# EAGLE board atmega328_tqfp32 (EAGLE 5.11)
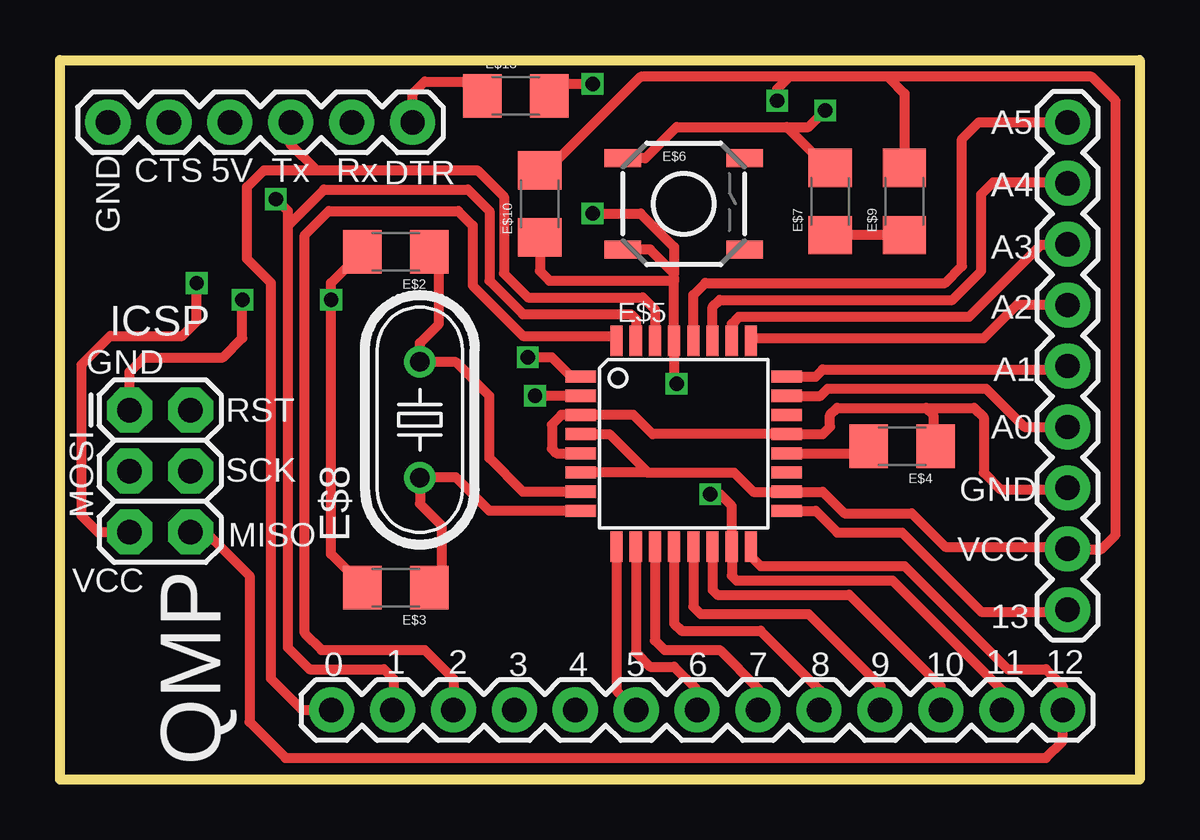
[diagram p0: board, top side]
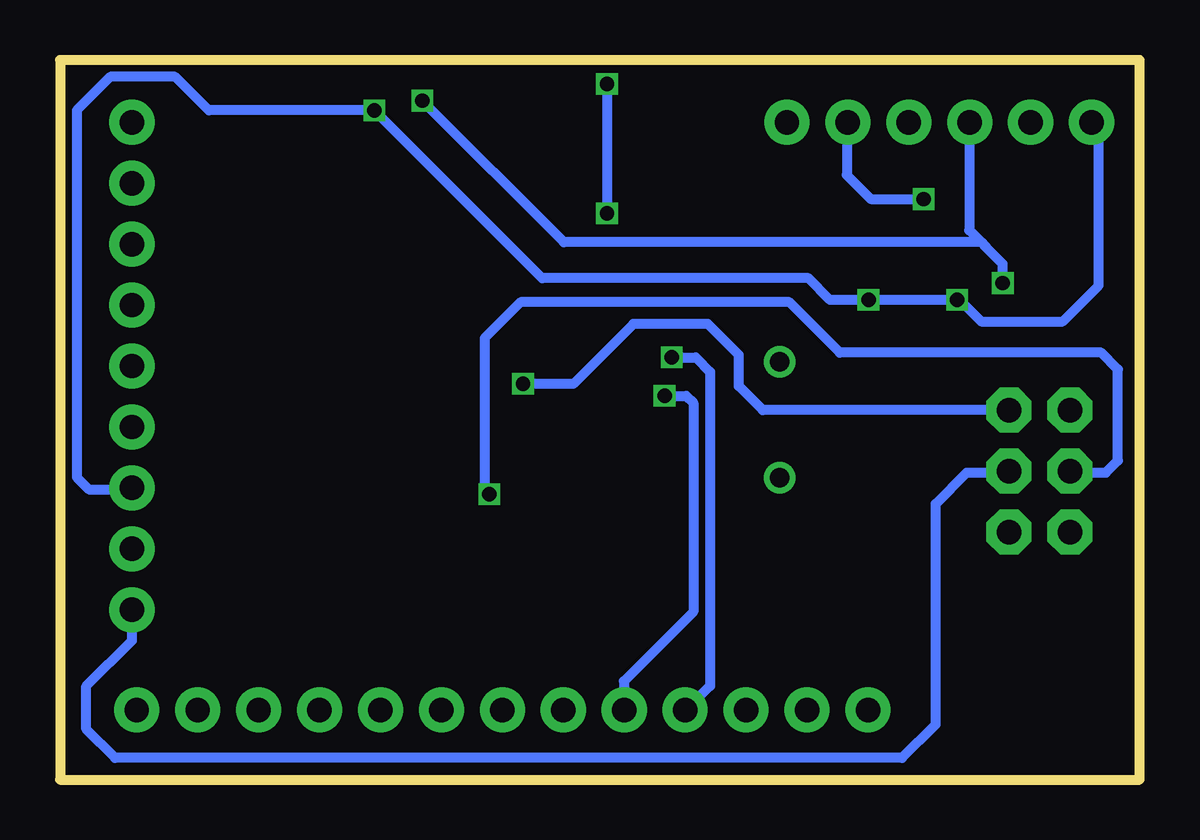
[diagram p1: board, bottom side, seen from below]

Size 45 x 30 mm. Coordinates in mm from the lower left corner, seen from the top.
Outline: 0,0 0,30 45,30 45,0 0,0
Copper layers (1*16): Top 0.035mm / dielectric 1.5mm / Bottom 0.035mm
Design rules "Fusion_eagle_rule_v1.1": minimum track width 6mil, minimum drill 12mil, track to track 6mil, track to pad 6mil, pad to pad 6mil, via to via 6mil, smd to smd 0mil, copper to edge 10mil, drill to drill 10mil, minimum pad ring 10mil, minimum via ring 6mil, stop-mask expansion 2mil, vias tented up to drill 100mil, thermal gap 10mil

## Footprints (pad centres in the part's own frame; a part is rotated, then mirrored left to right if it is on the bottom)
1206 = smd 1.6 x 1.8: 1 -1.4,0; 2 1.4,0
TQFP32-08 = smd 1.27 x 0.508: 1 -4.293,2.8; 2 -4.293,2; 3 -4.293,1.2; 4 -4.293,0.4; 5 -4.293,-0.4; 6 -4.293,-1.2; 7 -4.293,-2; 8 -4.293,-2.8; 17 4.293,-2.8; 18 4.293,-2; 19 4.293,-1.2; 20 4.293,-0.4; 21 4.293,0.4; 22 4.293,1.2; 23 4.293,2; 24 4.293,2.8 | smd 0.508 x 1.27: 9 -2.8,-4.293; 10 -2,-4.293; 11 -1.2,-4.293; 12 -0.4,-4.293; 13 0.4,-4.293; 14 1.2,-4.293; 15 2,-4.293; 16 2.8,-4.293; 25 2.8,4.293; 26 2,4.293; 27 1.2,4.293; 28 0.4,4.293; 29 -0.4,4.293; 30 -1.2,4.293; 31 -2,4.293; 32 -2.8,4.293
TACTILE_SWITCH_SMD = smd 1.524 x 0.762: 1 -2.54,1.905; 2 2.54,1.905; 3 -2.54,-1.905; 4 2.54,-1.905
HC49U-V = drill 0.813 round: 1 -2.413,0; 2 2.413,0
1X09 = drill 1.016 pad 1.88 round: 1 0,0; 2 2.54,0; 3 5.08,0; 4 7.62,0; 5 10.16,0; 6 12.7,0; 7 15.24,0; 8 17.78,0; 9 20.32,0
1X13 = drill 1.016 pad 1.88 round: 1 0,0; 2 2.54,0; 3 5.08,0; 4 7.62,0; 5 10.16,0; 6 12.7,0; 7 15.24,0; 8 17.78,0; 9 20.32,0; 10 22.86,0; 11 25.4,0; 12 27.94,0; 13 30.48,0
1X06 = drill 1.016 pad 1.88 round: 1 0,0; 2 2.54,0; 3 5.08,0; 4 7.62,0; 5 10.16,0; 6 12.7,0
2X3 = drill 1.016 pad 1.88 octagon: 1 0,0; 2 0,2.54; 3 2.54,0; 4 2.54,2.54; 5 5.08,0; 6 5.08,2.54

## Placement (x,y rotation side)
E$2  [1206]  14,22 180 top
E$3  [1206]  14,8 180 top
E$4  [1206]  35.1,13.9 180 top
E$5  [TQFP32-08]  26,14 0 top
E$6  [TACTILE_SWITCH_SMD]  26,24 0 top
E$7  [1206]  32.1,24.1 90 top
E$8  [HC49U-V]  15,15 90 top
E$9  [1206]  35.2,24.1 90 top
E$10  [1206]  20,24 90 top
E$11  [1X09]  42,27.4 270 top
E$12  [1X13]  41.8,2.9 180 top
E$13  [1206]  19,28.5 0 top
E$14  [1X06]  2,27.4 0 top
ICSP  [2X3]  2.9,15.4 270 top

## Library data of the parts
E$2-E$4 E$6-E$14 ICSP = SparkFun
E$5 = adafruit

## Nets
S$1: E$14.6
S$3: E$12.1
S$4: E$9.2
S$5: E$10.1
S$9: E$3.2 E$14.1 ICSP.1
S$19: E$11.1
S$23: E$12.11
S$29: E$12.6
S$42: E$11.6
S$44: E$9.1

## Tracks (layer width: path | path; a pad name or v marks a point on that pad's centre or on a via)
S$1
  Top 0.406: E$14.6 14.7,28.6 15.2,29.1 17.2,29.1 17.4,28.9
S$2
  Top 0.406: 20,25.5 20.1,25.6
S$3
  Top 0.406: 5.5,10.3 6.1,10.3 7.9,8.5 7.9,2.4 9.4,0.9 41.1,0.9 41.8,1.6 E$12.1 41.8,3.9 41.1,4.6 39.5,4.6 35.2,8.9 29.2,8.9 28.8,9.3
S$4  (via drill 0.6)
  Top 0.406: 2.9,10.3 1.6,10.3 0.9,11 0.9,17.3 2.1,18.5 5.1,18.5 5.7,19.1 v5.7,20.7 | E$9.2 35.2,28.6 34.5,29.3 | 20.3,25.4 24.2,29.3 30.4,29.3 | 34.5,29.3 30.4,29.3 | 34.5,29.3 43,29.3 44,28.3 44,10.2 43.4,9.6 42,9.6 41.9,9.7 36.9,9.7 35.5,11.1 32.7,11.1 31.8,12 30.5,12 | v29.9,28.3 29.9,28.8 30.4,29.3
  Bottom 0.406: v5.7,20.7 5.7,21.5 6.4,22.2 6.6,22.4 | 6.6,22.4 24,22.4 v29.9,28.3 | 7.1,27.4 7.1,22.9 6.6,22.4
S$5  (via drill 0.6)
  Top 0.406: v22.2,29 20.9,29 20.8,28.9 | v22.2,23.6 24.2,23.6 25.6,22.2 25.6,21.1 | E$10.1 20,21.2 20.4,20.8 25.6,20.8 | 25.6,18.5 25.6,20.8 | 25.6,20.8 25.6,20.9 25.6,21.1 | 25.6,21.1 24.6,22.1 23.5,22.1
  Bottom 0.406: v22.2,29 v22.2,23.6
S$6  (via drill 0.6)
  Top 0.406: 28,10 28,11.4 27.5,11.9 v27.1,11.9
  Bottom 0.406: 2.9,12.8 1.4,12.8 0.9,13.3 0.9,17.1 1.6,17.8 12.5,17.8 14.6,19.9 25.8,19.9 27.3,18.4 27.3,12.1 v27.1,11.9
S$8  (via drill 0.6)
  Top 0.406: 24,18.6 24,19.2 23.8,19.4 19.3,19.4 17.9,20.8 17.9,23.7 17,24.6 11,24.6 9.5,23.1 | 13.8,2.9 13.9,3 13.9,4.2 13.5,4.6 10.4,4.6 9.5,5.5 9.5,23 9.5,23.1 | 9.5,23.1 9.5,23.7 v9,24.2
  Bottom 0.406: 12.2,27.4 12.2,25.2 11.2,24.2 v9,24.2
S$9  (via drill 0.6)
  Top 0.406: ICSP.1 2.9,17 3.5,17.6 6.8,17.6 7.6,18.4 v7.6,20 | 23.5,25.9 24.4,25.9 25.7,27.2 30.3,27.2 | 30.3,27.2 31.8,25.7 | 30.3,27.2 31.2,27.2 v31.9,27.9 | E$3.2 12.6,8.1 11.3,9.4 v11.3,20 11.3,20.7 12.4,21.8
  Bottom 0.406: 42,12.2 42.1,12.1 43.8,12.1 44.3,12.6 44.3,27.9 42.9,29.3 40.2,29.3 38.8,27.9 v31.9,27.9 24.9,20.9 13.8,20.9 12.9,20 v11.3,20 v7.6,20 7.5,20 6.6,19.1 3.2,19.1 1.7,20.6 1.7,27.1 E$14.1
S$10  (via drill 0.6)
  Top 0.406: 25.6,18 25.6,16.6 v25.7,16.5
  Bottom 0.406: 5.4,15.4 15.7,15.4 16.7,16.4 16.7,17.7 18,19 21.1,19 23.6,16.5 v25.7,16.5
S$11
  Bottom 0.406: 42,7.1 42,5.8 43.9,3.9 43.9,2.1 42.7,0.9 9.9,0.9 8.5,2.3 8.5,11.5 7.2,12.8 5.4,12.8
S$12
  Top 0.406: 42,7.1 41.9,7 38.4,7 35.1,10.3 32.4,10.3 31.5,11.2 30.2,11.2
S$14
  Top 0.406: 30.5,13.6 33.3,13.6 33.4,13.7
S$16
  Top 0.406: 30.5,14.4 31.8,14.4 32.1,14.7 32.1,15.2 32.4,15.5 36.1,15.5 | 36.1,15.5 36.4,15.2 36.4,14.4 | 36.1,15.5 38.1,15.5 38.5,15.1 38.5,12.8 39.2,12.1 41.9,12.1 42,12.2
S$17
  Top 0.406: 21.7,11.2 17.9,11.2 16.5,12.6 15,12.6 15,11.5 15.9,10.6 15.9,8.7 15.5,8.3
S$18
  Top 0.406: 21.6,12 19.3,12 17.9,13.4 17.9,16 16.5,17.4 15,17.4 15,18.2 15.8,19 15.8,21.4 15.4,21.8
S$19
  Top 0.406: 26.4,18.4 26.4,20.2 26.9,20.7 36.9,20.7 37.6,21.4 37.6,26.7 38.3,27.4 E$11.1
S$21
  Top 0.406: 24.8,18.6 24.8,19.6 24.3,20.1 19.5,20.1 18.5,21.1 18.5,24.3 17.4,25.4 10.7,25.4 | 11.3,2.9 10.1,2.9 8.8,4.2 8.8,20.7 7.8,21.7 7.8,24.7 8.5,25.4 10.7,25.4 | 9.6,27.4 9.6,26.5 10.7,25.4
S$23
  Top 0.406: 23.2,18.5 19.3,18.5 17.2,20.6 17.2,23.1 16.6,23.7 11.2,23.7 10.2,22.7 10.2,6.1 10.9,5.4 15.2,5.4 16.4,4.2 E$12.11
S$24
  Top 0.406: 27.2,18.6 27.2,19.7 27.5,20 37.2,20 38.4,21.2 38.4,24.4 38.9,24.9 42,24.9
S$25  (via drill 0.6)
  Top 0.406: 21.5,16 v19.8,16
  Bottom 0.406: v19.8,16 18.9,16 18.6,15.7 18.6,7 21.5,4.1 21.5,2.9
S$26  (via drill 0.6)
  Top 0.406: 21.6,16.8 21.3,16.8 20.5,17.6 v19.5,17.6
  Bottom 0.406: v19.5,17.6 18.5,17.6 17.9,17 17.9,3.9 18.9,2.9
S$27
  Top 0.406: 23.2,9.6 23.2,3.7 24,2.9
S$28
  Top 0.406: 24,9.6 24,5.3 24.6,4.7 25.6,4.7 26.5,3.8 26.5,3 26.6,2.9
S$29
  Top 0.406: 24.8,9.6 24.8,5.8 25.2,5.4 27.5,5.4 29.1,3.8 E$12.6
S$30
  Top 0.406: 25.6,9.6 25.6,6.5 25.9,6.2 29.2,6.2 31.7,3.7 31.7,3 31.6,2.9
S$33
  Top 0.406: 26.4,9.6 26.4,7.2 26.7,6.9 31.2,6.9 34.2,3.9 34.2,2.9
S$35
  Top 0.406: 27.2,9.5 27.2,7.9 27.4,7.7 32.9,7.7 36.7,3.9 36.7,2.9
S$36
  Top 0.406: 28,9.5 28,8.5 28.2,8.3 34.7,8.3 39.3,3.7 39.3,3 39.2,2.9
S$40
  Top 0.406: 28,18.4 28,19 28.3,19.3 37.9,19.3 40.9,22.3 42,22.3
S$41
  Top 0.406: 28.8,18.4 38.5,18.4 39.9,19.8 42,19.8
S$42
  Top 0.406: 30.4,16 31.7,16 32,16.3 38.6,16.3 40.2,14.7 E$11.6
S$43
  Top 0.406: 30.4,16.8 31.5,16.8 31.8,17.1 41.8,17.1 42,17.3
S$44
  Top 0.406: E$9.1 32,22.7
S$46
  Top 0.406: 23.7,25.8 23.5,26
S$53
  Top 0.406: 24.5,12.8 21.9,12.8 | 24.5,12.8 28.1,12.8 28.9,12 30.1,12 | 22,14.4 22.9,14.4 24.5,12.8
S$54
  Top 0.406: 21.7,15.2 20.9,15.2 20.5,14.8 20.5,13.8 20.7,13.6 21.7,13.6
S$55
  Top 0.406: 30.2,14.4 24.7,14.4 23.9,15.2 21.9,15.2

## Text on the board
tNames: A5 | CTS | 5V | Tx | Rx | DTR | A4 | A4 | GND | A3 | A2 | GND | A1 | RST | A0 | SCK | GND | MOSI | MISO | VCC | VCC | 13 | 0 | 1 | 2 | 3 | 4 | 5 | 6 | 7 | 8 | 9 | 10 | 11 | 12 | QMP